# Altium PCB SIM808_module_PCB.PcbDoc
Units mm, origin at the board's own origin, x right, y up, seen from the top; angles counter-clockwise.
Board outline 77.65 x 50.14 mm, 2 copper layers (Top Layer, Bottom Layer), stack 2.071 mm thick; 23 components, 0 nets, 203 pads, 0 vias.
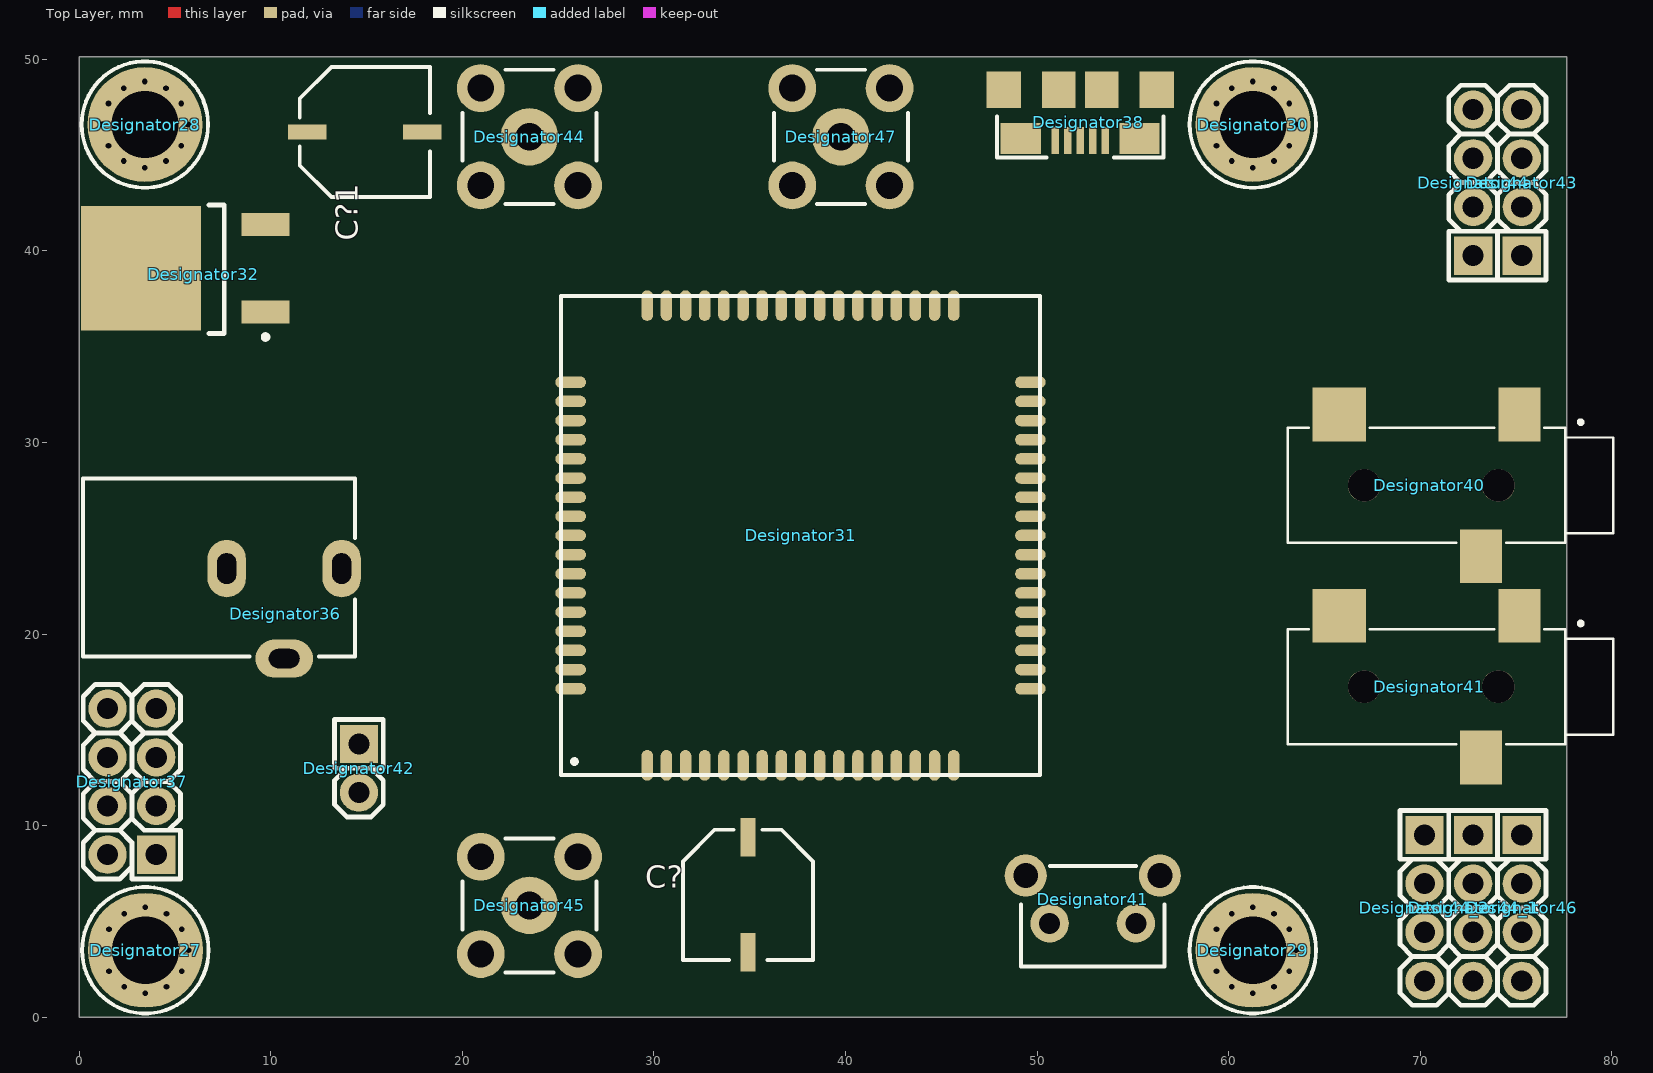
[diagram p0: Top Layer view]
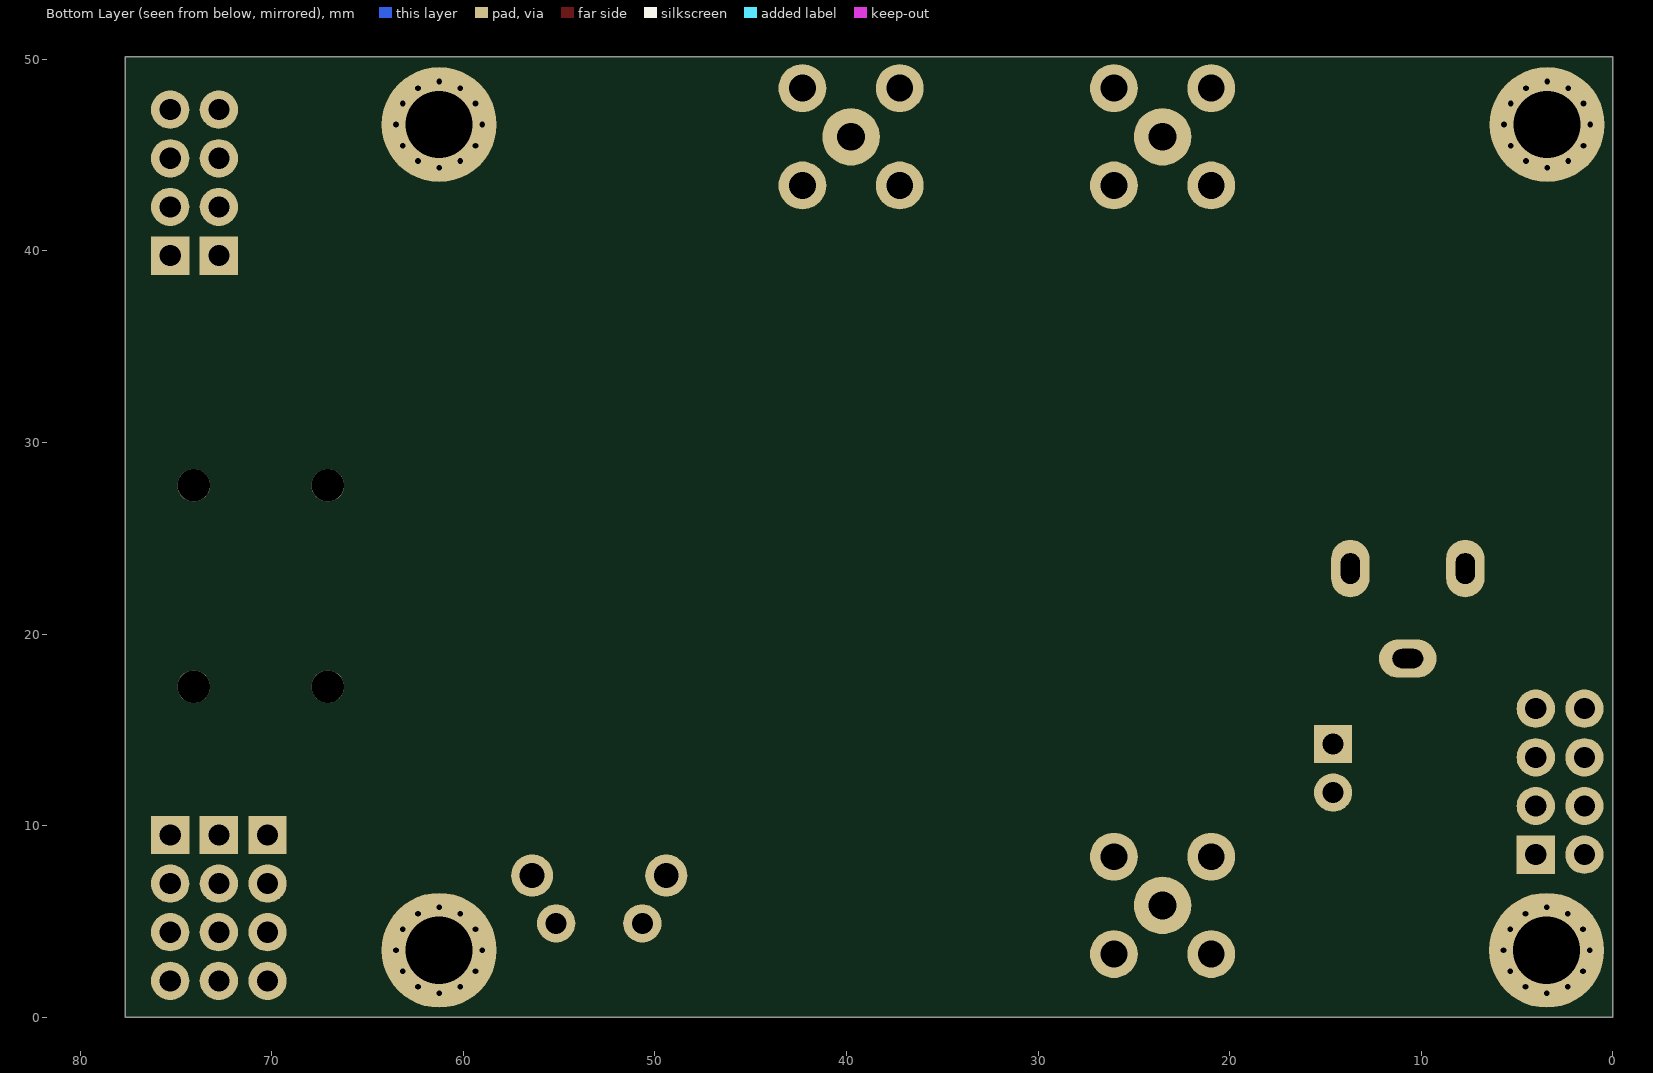
[diagram p1: Bottom Layer view, seen from below]

## Layer stack, top to bottom
Top Solder: solder mask 0.0102, Solder Resist, Dk 3.5
Top Layer: signal copper 0.0356
Dielectric 1: dielectric 2, FR-4, Dk 4.8
Bottom Layer: signal copper 0.0356
Bottom Solder: solder mask 0.0102, Solder Resist, Dk 3.5

## Board outline
0,0 77.648,0 77.648,50.14 0,50.14

## Design rules (kind name [scope] priority, off if disabled: settings)
Clearance [All] p1: gap=0.254 ignorepadtopadclearanceinfootprint=FALSE except(0: Arc-Hole Track-Hole SMDPad-Hole THPad-Hole Via-Hole Fill-Hole Poly-Hole Region-Hole Text-Hole)
ComponentClearance ComponentClearance_1 [All] p1: gap=0 collisioncheckmode=3 verticalgap=0.254 showdistances=FALSE
ComponentClearance [All] p2: gap=0.254 collisioncheckmode=3 verticalgap=0.254 showdistances=FALSE
PolygonConnect [All] p1: connectstyle=Relief reliefconductorwidth=0.254 reliefentries=4 polygonreliefangle="90 Angle" airgapwidth=0.254
RoutingVias [All] p1: holewidth=0.711 width=1.27 viastyle="Through Hole" minholewidth=0.711 minwidth=1.27 maxholewidth=0.711 maxwidth=1.27
SolderMaskExpansion [All] p1: expansion=0.102 istentingtop=FALSE
Width [All] p1: maxlimit=0.254 minlimit=0.254 preferedwidth=0.254
29 further rules are at their usual default settings.

## Components (designator, comment, footprint, x,y, rotation, side; value= is the part's Value field where it differs from the comment)
C? "Comment" D6.6C6.6H6.1 34.91,6.39 r270 top
C?1 "Comment" D6.6C6.6H6.1 14.91,46.21 r0 top
Designator27 "Comment" "CON: PADS 1x3mm" 3.45,3.5 r0 top
Designator28 "Comment" "CON: PADS 1x3mm" 3.425,46.6 r0 top
Designator29 "Comment" "CON: PADS 1x3mm" 61.261,3.5 r0 top
Designator30 "Comment" "CON: PADS 1x3mm" 61.261,46.6 r0 top
Designator31 "Comment" "MOD: SIM808" 37.65,25.15 r90 top
Designator32 "Comment" "DPAK - 21" 6.475,39.1 r180 top
Designator36 "Comment" "CON: PJ-102AH" 10.7,23.425 r0 top
Designator37 "Comment" "CON: PLD-8" 2.75,12.3 r90 top
Designator38 "Comment" "CON: USB-A micro" 52.25,45.775 r180 top
Designator40 "Comment" CUIDEVICES_SJ-3523-SMT-TR 74.075,27.766 r180 top
Designator41 "Comment" CUIDEVICES_SJ-3523-SMT-TR 74.075,17.258 r180 top
Designator41 "Comment" "BUT: 6x6 mm (R)" 50.657,4.9 r0 top
Designator42 "Comment" "CON: PLS-2" 14.6,13 r270 top
Designator43 "Comment" "CON: PLS-4" 75.3,43.57 r90 top
Designator44 "Comment" "CON: SMA" 23.5,45.96 r0 top
Designator44 "Comment" "CON: PLS-4" 72.76,43.57 r90 top
Designator44_1 "Comment" "CON: PLS-4" 72.76,5.71 r270 top
Designator44_2 "Comment" "CON: PLS-4" 70.22,5.71 r270 top
Designator45 "Comment" "CON: SMA" 23.5,5.84 r0 top
Designator46 "Comment" "CON: PLS-4" 75.3,5.71 r270 top
Designator47 "Comment" "CON: SMA" 39.76,45.96 r0 top

## Footprints (in the part's own frame and the unit in brackets; to place one, negate y for a bottom-side part, rotate by r counter-clockwise, add the part's x,y. Pads: shape width x height; smd on the part's side, far side on the other; paste and mask are expansions set on the pad)
"BUT: 6x6 mm (R)" [mm]
  round 2.2 hole 1.3: 0(-1.25,2.5) 0(5.75,2.5)
  round 2 hole 1.1: 1(0,0) 2(4.5,0)
  silkscreen extent -1.5,-2.25 6,3, body extent -1.45,-6.85 5.95,4.15, height 7
"CON: PADS 1x3mm" [mm]
  round 0.7 hole 0.3: 1(-2.25,0) 1(-1.9,-1.1) 1(-1.9,1.1) 1(-1.1,-1.9) 1(-1.1,1.9) 1(0,-2.25) 1(0,2.25) 1(1.1,-1.9) 1(1.1,1.9) 1(1.9,-1.1) 1(1.9,1.1) 1(2.25,0)
  round 6 hole 3.5: ""(0,0)
  silkscreen extent -3.3,-3.3 3.3,3.3
"CON: PJ-102AH" [mm]
  oval 2x3 hole 1 slot 1.6 at 90 deg: 1(3,0) 2(-3,0)
  oval 3x2 hole 1 slot 1.6 at 0 deg: 2(0,-4.7)
  round 0.5 on Mech1: ""(3.1,-4.3)
  silkscreen extent -10.5,-4.6 3.7,4.7, body extent -10.8,-4.8 3.6,4.6, height 11
"CON: PLD-8" [mm] "PLD-40 8 pin header"
  rect 2x2 hole 1.1: 1(-3.81,-1.27)
  round 2 hole 1.1: 2(-3.81,1.27) 3(-1.27,-1.27) 4(-1.27,1.27) 5(1.27,-1.27) 6(1.27,1.27) 7(3.81,-1.27) 8(3.81,1.27)
  silkscreen extent -5.08,-2.54 5.08,2.54, body extent -5.13,-2.55 5.03,2.53, height 8.54
"CON: PLS-2" [mm]
  rect 2x2 hole 1.1: 1(-1.27,0)
  round 2 hole 1.1: 2(1.27,0)
  silkscreen extent -2.54,-1.27 2.54,1.27, body extent -2.57,-1.28 2.51,1.26, height 8.54
"CON: PLS-4" [mm] "PLS-40 4 pin header"
  rect 2x2 hole 1.1: 1(-3.81,0)
  round 2 hole 1.1: 2(-1.27,0) 3(1.27,0) 4(3.81,0)
  silkscreen extent -5.08,-1.27 5.08,1.27, body extent -5.08,-1.27 5.08,1.27, height 8.54
"CON: SMA" [mm]
  round 3 hole 1.45: 1(0,0)
  round 2.5 hole 1.4: 2(-2.54,-2.54) 2(-2.54,2.54) 2(2.54,-2.54) 2(2.54,2.54)
  silkscreen extent -3.5,-3.5 3.5,3.5, body extent -3.5,-3.5 3.5,3.5, height 9.53
"CON: USB-A micro" [mm]
  rect 1.8x1.9 smd: 0(-4,-2.65) 0(4,-2.65)
  rect 2.1x1.6 smd: 0(-3.1,-0.1) 0(3.1,-0.1)
  rect 1.75x1.9 smd: 0(-1.125,-2.65) 0(1.125,-2.65)
  rect 0.4x1.4 smd: 1(-1.3,0) 2(-0.65,0) 3(0,0) 4(0.65,0) 5(1.3,0)
  round 0.5 on Top Overlay: ""(-4.85,0.75)
  silkscreen extent -4.35,-1.25 4.35,0.9, body extent -3.9,-4.8 3.9,0.2, height 2.68
CUIDEVICES_SJ-3523-SMT-TR [mm] "CONN JACK STEREO 3.5MM SMD R/A"
  rect 2.2x2.8 smd: 1(-1.1,-3.7) 3(0.9,3.7)
  rect 2.8x2.8 smd: 2(8.3,-3.7)
  round 1.7 hole 1.7 unplated: ""(0,0) ""(7,0)
  silkscreen extent -6,-3.4 11,3, body extent -5.96,-4.55 11.04,4.45, height 5
D6.6C6.6H6.1 [mm]
  rect 2x0.8 smd: 1(-3,0) 2(3,0)
  silkscreen extent -3.4,-3.4 3.4,3.4, body extent -3.65,-3.3 3.65,3.3, height 5.85
"DPAK - 21" [mm] "D-Pak, Body 6,2x6,7mm"
  rect 2.5x1.2 smd: 1(-3.25,-2.29) 2(-3.25,2.29)
  rect 6.25x6.5 smd: 2(3.25,0)
  round 0.5 on Mech1: ""(-3.2,2.9)
  silkscreen extent -3.37,-3.3 -0.3,3.71, body extent -3.8,-3.32 6.3,3.42, height 2.37
"MOD: SIM808" [mm]
  oval 1.6x0.6 smd: 1(-12,8) 2(-12,7) 3(-12,6) 4(-12,5) 5(-12,4) 6(-12,3) 7(-12,2) 8(-12,1) 9(-12,0) 10(-12,-1) 11(-12,-2) 12(-12,-3) 13(-12,-4) 14(-12,-5) 15(-12,-6) 16(-12,-7) 17(-12,-8) 35(12,-8) 36(12,-7) 37(12,-6) 38(12,-5) 39(12,-4) 40(12,-3) 41(12,-2) 42(12,-1) 43(12,0) 44(12,1) 45(12,2) 46(12,3) 47(12,4) 48(12,5) 49(12,6) 50(12,7) 51(12,8)
  oval 0.6x1.6 smd: 18(-8,-12) 19(-7,-12) 20(-6,-12) 21(-5,-12) 22(-4,-12) 23(-3,-12) 24(-2,-12) 25(-1,-12) 26(0,-12) 27(1,-12) 28(2,-12) 29(3,-12) 30(4,-12) 31(5,-12) 32(6,-12) 33(7,-12) 34(8,-12) 52(8,12) 53(7,12) 54(6,12) 55(5,12) 56(4,12) 57(3,12) 58(2,12) 59(1,12) 60(0,12) 61(-1,12) 62(-2,12) 63(-3,12) 64(-4,12) 65(-5,12) 66(-6,12) 67(-7,12) 68(-8,12)
  silkscreen extent -12.5,-12.5 12.5,12.5, body extent -12,-12 12,12, height 2.8

## Nets (pads, with @x,y where several pads share a name; then routed paths per layer and width w, separated by ;. In a path a pad name is that pad's centre, name@x,y a point inside that pad or via, vN(x,y) a via of type N, cw(c..) or ccw(c..) an arc to the next point about the centre after c; other vN are vias at no path point)
pads on no net: C?1.1 C?1.2 C?.1 C?.2 Designator27. Designator27.1 Designator28. Designator28.1 Designator29. Designator29.1 Designator30. Designator30.1 Designator31.1 Designator31.2 Designator31.3 Designator31.4 Designator31.5 Designator31.6 Designator31.7 Designator31.8 Designator31.9 Designator31.10 Designator31.11 Designator31.12 Designator31.13 Designator31.14 Designator31.15 Designator31.16 Designator31.17 Designator31.18 Designator31.19 Designator31.20 Designator31.21 Designator31.22 Designator31.23 Designator31.24 Designator31.25 Designator31.26 Designator31.27 Designator31.28 Designator31.29 Designator31.30 Designator31.31 Designator31.32 Designator31.33 Designator31.34 Designator31.35 Designator31.36 Designator31.37 Designator31.38 Designator31.39 Designator31.40 Designator31.41 Designator31.42 Designator31.43 Designator31.44 Designator31.45 Designator31.46 Designator31.47 Designator31.48 Designator31.49 Designator31.50 Designator31.51 Designator31.52 Designator31.53 Designator31.54 Designator31.55 Designator31.56 Designator31.57 Designator31.58 Designator31.59 Designator31.60 Designator31.61 Designator31.62 Designator31.63 Designator31.64 Designator31.65 Designator31.66 Designator31.67 Designator31.68 Designator32. Designator32.1 Designator32.2 Designator36. Designator36.1 Designator36.2 Designator37.1 Designator37.2 Designator37.3 Designator37.4 Designator37.5 Designator37.6 Designator37.7 Designator37.8 Designator38. Designator38.0 Designator38.1 Designator38.2 Designator38.3 Designator38.4 Designator38.5 Designator40. Designator40.1 Designator40.2 Designator40.3 Designator41. Designator41.0 Designator41.1 Designator41.2 Designator41.3 Designator42.1 Designator42.2 Designator43.1 Designator43.2 Designator43.3 Designator43.4 Designator44.1 Designator44.2 Designator44.3 Designator44.4 Designator44_1.1 Designator44_1.2 Designator44_1.3 Designator44_1.4 Designator44_2.1 Designator44_2.2 Designator44_2.3 Designator44_2.4 Designator45.1 Designator45.2 Designator46.1 Designator46.2 Designator46.3 Designator46.4 Designator47.1 Designator47.2

## Silkscreen, mask and mechanical layers (free items; w line width, h text height)
Area:
  the board outline again, w0.2

## Dimensions
0,50.14 to 77.648,50.14 on Size
0,0 to 0,50.14 on Size